# Altium PCB V1.PcbDoc
Units mil, origin at the board's own origin, x right, y up, seen from the top; angles counter-clockwise.
Board outline 1864.61 x 846.94 mil, 2 copper layers (Top Layer, Bottom Layer); 53 components, 58 nets, 253 pads, 63 vias.
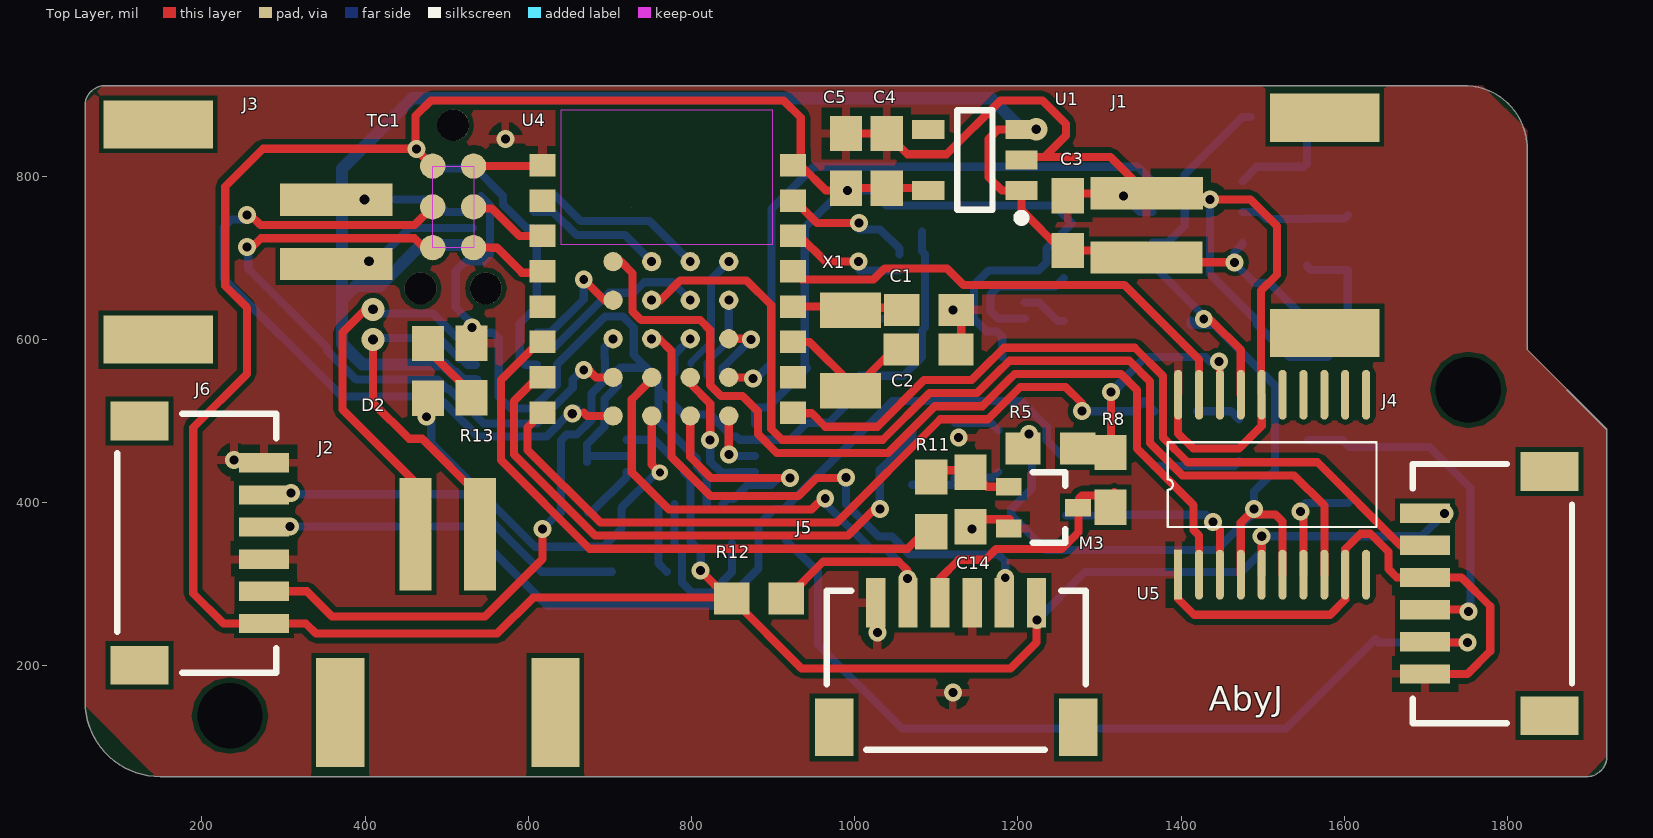
[diagram p0: Top Layer view]
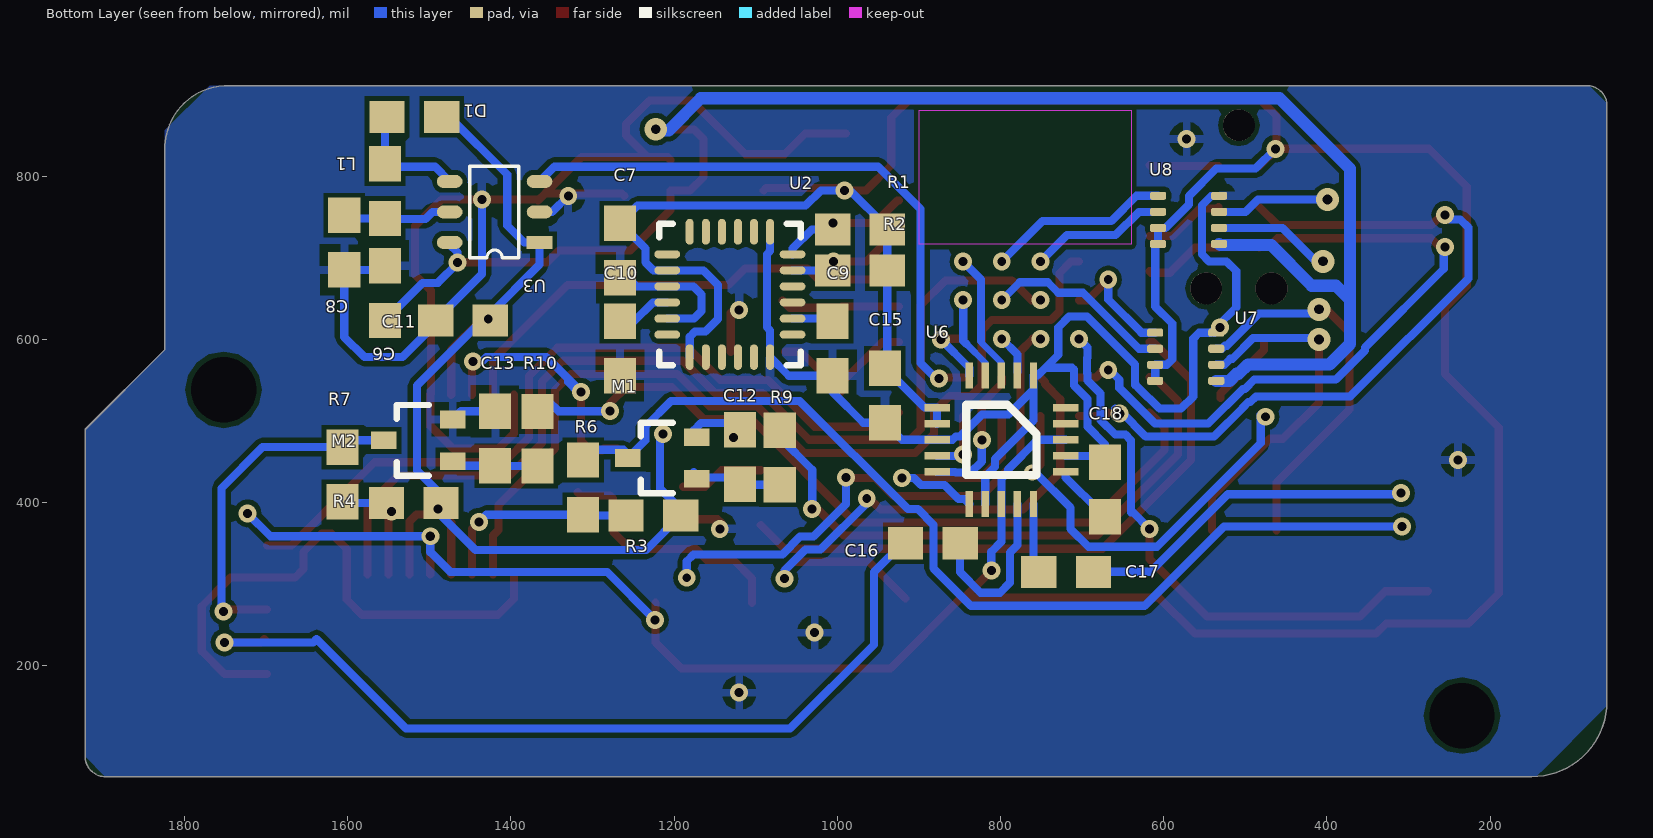
[diagram p1: Bottom Layer view, seen from below]
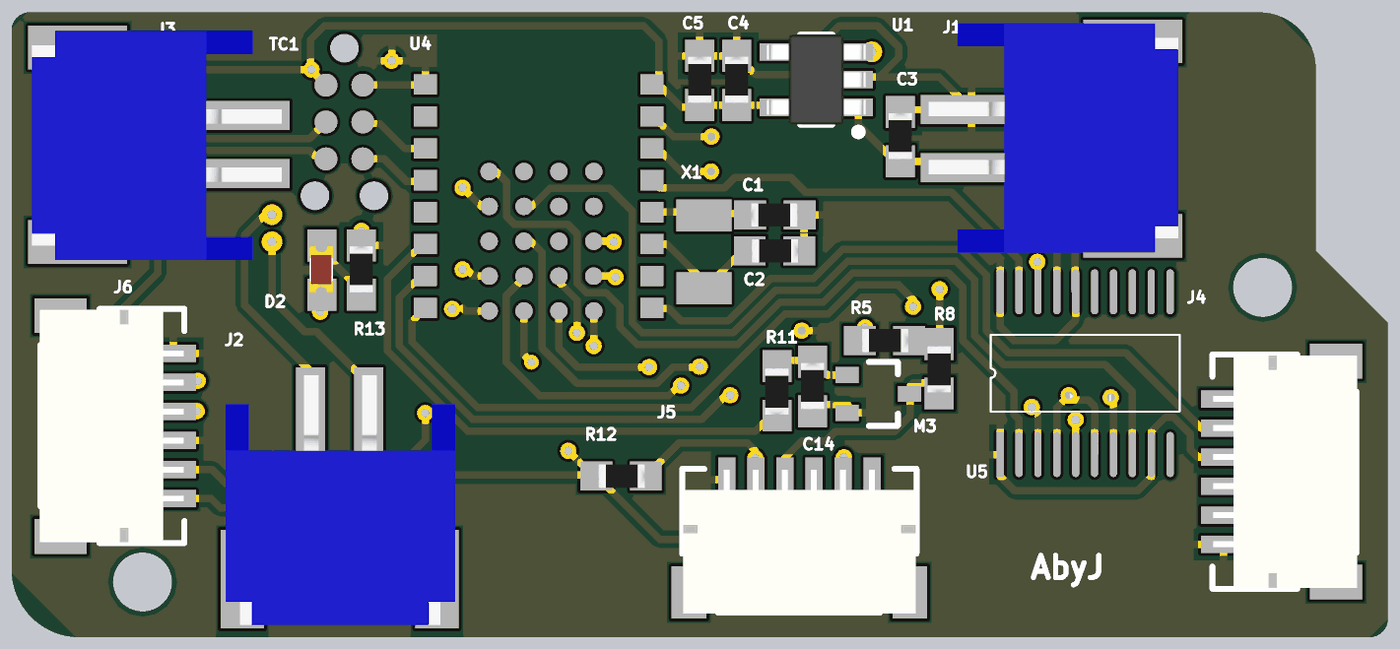
[diagram p2: 3D render of the assembled board from above, using the file's embedded part models]
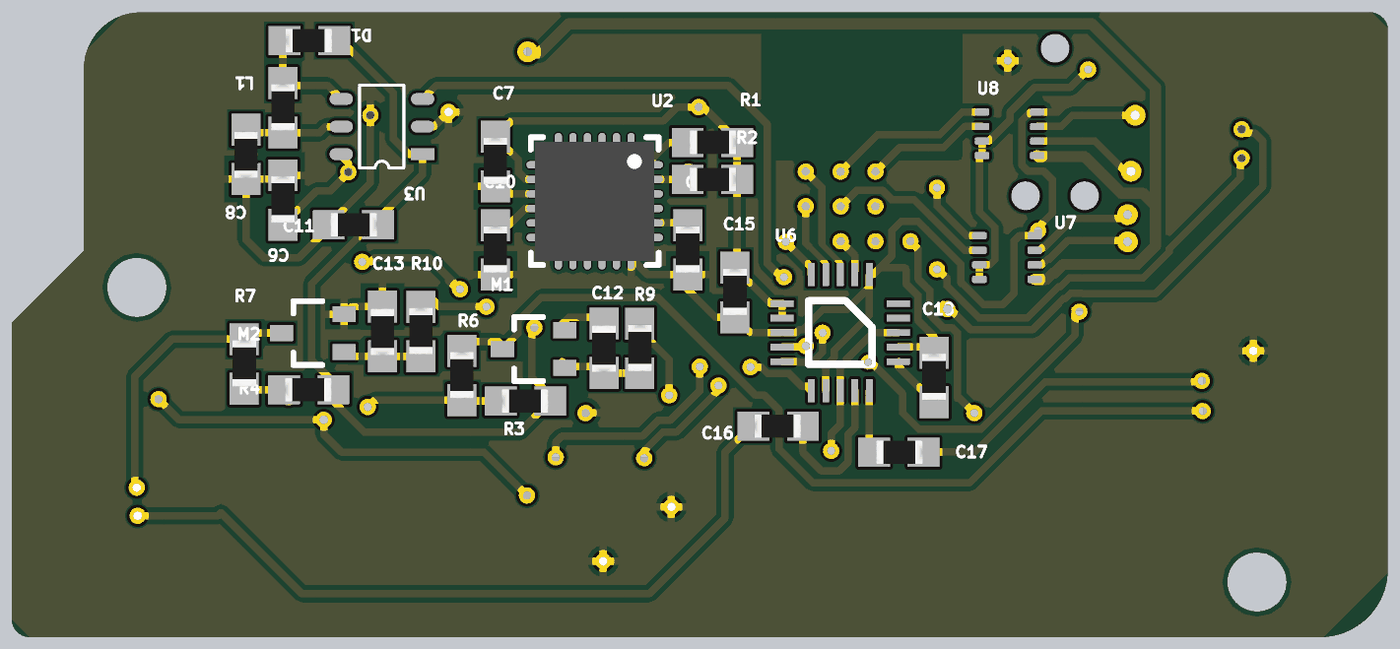
[diagram p3: 3D render of the assembled board from below, using the file's embedded part models]

## Layer stack, top to bottom
Top Solder: solder mask 0.4, Solder Resist, Dk 3.5
Top Layer: signal copper 1.4
Dielectric 1: dielectric 12.6, FR-4, Dk 4.8
Bottom Layer: signal copper 1.4
Bottom Solder: solder mask 0.4, Solder Resist, Dk 3.5

## Board outline
149.18,63.93 cw(c149.04,155.99) 56.98,155.86 56.98,889.09 57.07,889.09 cw(c81.49,886.29) 81.49,910.87 81.49,910.79 1744.37,910.79 1744.37,910.72 cw(c1746.96,833.93) 1823.75,836.53 1823.75,587.53 1921.59,489.69 1921.59,88.74 cw(c1896.78,88.74) 1896.78,63.93

## Design rules (kind name [scope] priority, off if disabled: settings)
Clearance [All] p1: gap=6 ignorepadtopadclearanceinfootprint=FALSE
MinimumSolderMaskSliver [All] p1 off: minsoldermaskwidth=6
PolygonConnect [All] p1: connectstyle=Relief reliefconductorwidth=10 reliefentries=4 polygonreliefangle="90 Angle" airgapwidth=10
RoutingVias [All] p1: holewidth=12 width=22 viastyle="Through Hole" minholewidth=10 minwidth=20 maxholewidth=25 maxwidth=40
SilkToSilkClearance [All] p1: silktosilkclearance=6
SilkToSolderMaskClearance [IsPad] p1 off: minsilkscreentomaskgap=10 clearancetoexposedcopper=TRUE
SolderMaskExpansion [All] p1: expansion=4
Width [All] p1: maxlimit=30 minlimit=6 preferedwidth=10
27 further rules are at their usual default settings.

## Components (designator, comment, footprint, x,y, rotation, side; value= is the part's Value field where it differs from the comment)
C1 "18pF" 0603W 1090.03,635.95 r0 top
C2 "18pF" 0603W 1091.5,587.53 r180 top
C3 "10uF" 0603W 1261.04,743.26 r270 top
C4 "100uF" 0603W 1039.2,819.56 r270 top
C5 "0.1uF" 0603W 989.2,819.56 r270 top
C6 "1uF" 0603W 1554.15,657.46 r270 bottom
C7 "10nF" 0603W 1266.18,709.65 r270 bottom
C8 "4.7uF" 0603W 1604.15,717.46 r90 bottom
C9 "2.2nF" 0603W 1005.63,589.65 r270 bottom
C10 "0.1uF" 0603W 1266.18,589.65 r270 bottom
C11 "1uF" 0603W 1457.7,623.01 r0 bottom
C12 "4.7uF" 0603W 1119.06,454.63 r90 bottom
C13 "4.7uF" 0603W 1419.25,477.38 r90 bottom
C14 "4.7uF" 0603W 1141.86,404.58 r270 top
C15 "0.1uF" 0603W 941.57,532.06 r270 bottom
C16 "10uF" 0603W 883.94,350 r180 bottom
C17 "10uF" 0603W 718.57,314.56 r0 bottom
C18 "1uF" 0603W 671.92,416.92 r270 bottom
D1 "D Schottky" 0603W 1519.15,872.46 r180 bottom
D2 "LED" "0603 LED" 477.57,562.04 r270 top
J1 "JST PH 2" "JST PH 2" 1369.14,713.68 r90 top
J2 "JST PH 2" "JST PH 2" 475.48,349.41 r0 top
J3 "JST PH 2" "JST PH 2" 353.24,757.21 r270 top
J4 "6 Pin" "JST SM06B-SRSS-TB" 1778.84,288.34 r270 top
J5 "6 Pin" "JST SM06B-SRSS-TB" 1124.28,197 r180 top
J6 "6 Pin" "JST SM06B-SRSS-TB" 196.1,350.17 r90 top
L1 "22uH" 0603W 1554.15,782.46 r270 bottom
M1 "MOSFET N CHANNEL" SOT323 1214.31,454.49 r0 bottom
M2 "MOSFET N CHANNEL" SOT323 1513.34,476.13 r0 bottom
M3 "MOSFET N CHANNEL" SOT323 1231.12,393.66 r0 top
R1 "10K" 0603W 971.18,734.65 r0 bottom
R2 "10K" 0603W 971.18,684.39 r0 bottom
R3 "10K" 0603W 1226.3,383.98 r180 bottom
R4 "10K" 0603W 1519.92,399.15 r180 bottom
R5 "10K" 0603W 1240.62,465.9 r180 top
R6 "50" 0603W 1311.46,419.47 r270 bottom
R7 "50" 0603W 1606.36,435.26 r270 bottom
R8 "50" 0603W 1313.4,426.78 r90 top
R9 "10K" 0603W 1070.39,456.15 r270 bottom
R10 "10K" 0603W 1367.28,479.02 r270 bottom
R11 "10K" 0603W 1093.74,396.72 r90 top
R12 "300K" 0603W 883.75,282.2 r180 top
R13 "300K" 0603W 530.59,562.62 r270 top
TC1 "" TC2030-IDC-NL 507.9,762.19 r270 top
U1 "MIC5205_VOLTAGE_REG" SOT-23-5 1204.2,782.16 r180 top
U2 "MPU-6050" QFN24 1131.18,654.65 r270 bottom
U3 "MAX8570" SOT23-6 1364.73,718.57 r0 bottom
U4 "B3 DCC ,C3 DEC4 for power saving , 10uH , 15nH" BC832 617.32,485.62 r0 top
U5 "INA418" TSSOP-20 1396.27,311.54 r90 top
U6 "PCM1774RGPT" QFN20 759.52,555.54 r270 bottom
U7 "DRV8838" DRV8838 575.96,575.53 r0 bottom
U8 "DRV8838" DRV8838 572.43,743.3 r0 bottom
X1 "32.768 Crystal" "32.768 Crystal" 994.21,632.57 r270 top

## Footprints (in the part's own frame and the unit in brackets; to place one, negate y for a bottom-side part, rotate by r counter-clockwise, add the part's x,y. Pads: shape width x height; smd on the part's side, far side on the other; paste and mask are expansions set on the pad)
"32.768 Crystal" [mm] "for BLE radio"
  rect 1.1x1.9 smd: 1(-0.07,0.019) 2(2.432,0.02)
  body extent -0.39,-0.71 2.81,0.78, height 0.9
"0603 LED" [mm]
  rect 1.1x1 smd: 1(0.868,-0.008) 2(-0.832,-0.008)
  body extent -0.8,-0.42 0.8,0.38, height 0.6
0603W [mm]
  rect 1.1x1 smd: 1(-0.825,0) 2(0.875,0)
  body extent -0.8,-0.4 0.8,0.4, height 0.45
BC832 [mil]
  rect 31.5x27.56 smd: P$1(0,327.56) P$2(0,284.25) P$3(0,240.94) P$4(0,197.64) P$5(0,154.33) P$6(0,111.02) P$7(0,67.72) P$8(0,24.41) P$9(307.09,24.41) P$10(307.09,67.72) P$11(307.09,111.02) P$12(307.09,154.33) P$13(307.09,197.64) P$14(307.09,240.94) P$15(307.09,284.25) P$16(307.09,327.56)
  rrect100% 23.62x23.62 smd: P$A1(86.61,209.41) P$A2(86.61,162.17) P$A3(86.61,114.92) P$A4(86.61,67.68) P$A5(86.61,20.43) P$B1(133.86,209.41) P$B2(133.86,162.17) P$B3(133.86,114.92) P$B4(133.86,67.68) P$B5(133.86,20.43) P$C1(181.1,209.41) P$C2(181.1,162.17) P$C3(181.1,114.92) P$C4(181.1,67.68) P$C5(181.1,20.43) P$D1(228.35,209.41) P$D2(228.35,162.17) P$D3(228.35,114.92) P$D4(228.35,67.68) P$D5(228.35,20.43)
DRV8838 [mm]
  rrect50% 0.5x0.25 smd: 1(-1.025,0.675) 2(-1.025,0.175) 3(-1.025,-0.325) 4(-1.025,-0.825) 5(0.875,-0.825) 6(0.875,-0.325) 7(0.875,0.175) 8(0.875,0.675)
"JST PH 2" [mm] "2mm pitch"
  rect 1x3.5 smd: 1(-0.346,0.295) 2(1.657,0.294)
  rect 1.5x3.4 smd: 3(-2.691,-5.251) 4(4.005,-5.252)
  body extent -3.27,-6.83 4.63,1.77, height 5.5
"JST SM06B-SRSS-TB" [mm] "1.0mm pitch/Disconnectable Crimp style connector"
  rect 0.6x1.55 smd: 1(-2.5,-2.032) 2(-1.5,-2.032) 3(-0.5,-2.032) 4(0.5,-2.032) 5(1.5,-2.032) 6(2.5,-2.032)
  rect 1.2x1.8 smd: M(-3.8,1.843) M(3.8,1.843)
  silkscreen extent -4.03,-2.41 4.03,2.54, body extent -4,-2.38 4,2.57, height 2.95
QFN20 [mm]
  rect 0.8x0.23 smd: 1(0,0) 2(0,-0.5) 3(0,-1) 4(0,-1.5) 5(0,-2) 11(4,-2) 12(4,-1.5) 13(4,-1) 14(4,-0.5) 15(4,0)
  rect 0.23x0.8 smd: 6(1,-3) 7(1.5,-3) "8 EP"(2,-3) 9(2.5,-3) 10(3,-3) 16(3,1) 17(2.5,1) 18(2,1) 19(1.5,1) 20(1,1)
  silkscreen extent 0.91,-2.09 3.09,0.09
QFN24 [mm] "pitch 0.5mm"
  oval 0.8x0.25 smd mask+0.05: 1(-1.955,1.24) 2(-1.955,0.74) 3(-1.955,0.24) 4(-1.955,-0.26) 5(-1.955,-0.76) 6(-1.955,-1.26) 13(1.945,-1.26) 14(1.945,-0.76) 15(1.945,-0.26) 16(1.945,0.24) 17(1.945,0.74) 18(1.945,1.24)
  oval 0.25x0.8 smd mask+0.05: 7(-1.255,-1.96) 8(-0.755,-1.96) 9(-0.255,-1.96) 10(0.245,-1.96) 11(0.745,-1.96) 12(1.245,-1.96) 19(1.245,1.94) 20(0.745,1.94) 21(0.245,1.94) 22(-0.255,1.94) 23(-0.755,1.94) 24(-1.255,1.94)
  silkscreen extent -2.21,-2.21 2.19,2.19, body extent -2.06,-2.06 2.05,2.04, height 0.95
SOT23-6 [mm]
  rect 0.8x0.4 smd: 1(0,0)
  oval 0.8x0.4 smd: 2(0,-0.95) 3(0,-1.9) 4(2.8,-1.9) 5(2.8,-0.95) 6(2.8,0)
  silkscreen extent 0.65,-2.38 2.17,0.48
SOT323 [mm] "Smaller package for SOT23"
  rect 0.8x0.55 smd: 1(-1.075,0.65) 2(-1.075,-0.65) 3(1.075,0)
  silkscreen extent -0.32,-1.1 0.67,1.1, body extent -0.67,-1.1 0.67,1.1, height 1.1
SOT-23-5 [mm] "3D view"
  rect 1x0.6 smd: 1(0,0) 2(0,-0.95) 3(0,-1.9) 4(2.9,-1.9) 5(2.9,0)
  silkscreen extent -0.13,-2.5 2,0.97, body extent -0.25,-2.5 3.15,0.6, height 1.45
TC2030-IDC-NL [mil]
  round 39 hole 39 unplated: 1(-100,0) 1(100,40) 2(100,-40)
  rrect100% 31x31 smd: 1(-50,-25) 2(-50,25) 3(0,-25) 4(0,25) 5(50,-25) 6(50,25)
  Top Layer keep-out region: -50,-25 -50,25 50,25 50,-25
TSSOP-20 [mm]
  rect 1.55x0.25 smd: 1(0,0)
  oval 1.55x0.25 smd: 2(0,-0.65) 3(0,-1.3) 4(0,-1.95) 5(0,-2.6) 6(0,-3.25) 7(0,-3.9) 8(0,-4.55) 9(0,-5.2) 10(0,-5.85) 11(5.6,-5.85) 12(5.6,-5.2) 13(5.6,-4.55) 14(5.6,-3.9) 15(5.6,-3.25) 16(5.6,-2.6) 17(5.6,-1.95) 18(5.6,-1.3) 19(5.6,-0.65) 20(5.6,0)
  silkscreen extent 1.48,-6.18 4.12,0.33

## Part data
C1 C2 C3 C4 C5 C6 C7 C8 C9 C10 C11 C12 C13 C14 C15 C16 C17 C18: library part Capacitor, "SMD Cap 0603"
D1: "Schottky Diode", Code_JEDEC=DO-214-AA, LatestRevisionDate=17-Jul-2002, LatestRevisionNote="Re-released for DXP Platform.", PackageDescription="DO-214-AA/SMB; 2 C-Bend Leads; Body 5.3 x 3.6 mm, inc. leads (LxW)", PackageReference=SMB, Published=8-Jun-2000, Publisher="Altium Limited"
D2: "LED SMD 1206/0603"
J1 J2 J3: Supplier Part Number 1=455-1749-6-ND, Supplier 1=Digikey
L1: library part Inductor
M1 M2 M3: digikey part number=568-5987-1-ND
R1 R2 R3 R4 R5 R6 R7 R8 R9 R10 R11 R12 R13: library part Resistor
TC1: library part TC2030-IDC-NL, DeviceName=-NL, DeviceSetName=TC2030-IDC, GateName_1=A, LibraryName=TagConnect, Package=TC2030-IDC-NL, SymbolName_1=TC2030-IDC
U1: "3.3V LDO SMD", Sparkfun #=PRT-1125
U2: Package=QFN.24.4X4, DeviceSetName=MPU-6050, GateName_1=G$1, LibraryName=invensense, SymbolName_1=MPU-6050
U4: library part BC832-V1, Package=BC832, DeviceSetName=BC832-V1, GateName_1=G$1, LibraryName=BC832, SymbolName_1=BC832-V1
U6: Package=QFN-20-4X4, DeviceName=RGPT, DeviceSetName=PCM1774, GateName_1=G$1, LibraryName=TI, SymbolName_1=PCM1774
X1: digikey number=XC1617CT-ND

## Free pads (board coordinates)
  round 39 hole 80 unplated: 1(234.36,138.74) 2(1751.89,537.97)

## Via types
v1: diameter 22, hole 11, Top Layer to Bottom Layer, 55 vias
v2: diameter 28, hole 12, Top Layer to Bottom Layer, 5 vias
v3: diameter 22, hole 12, Top Layer to Bottom Layer, 2 vias
v4: diameter 20, hole 10, Top Layer to Bottom Layer, 1 vias

## Nets (pads, with @x,y where several pads share a name; then routed paths per layer and width w, separated by ;. In a path a pad name is that pad's centre, name@x,y a point inside that pad or via, vN(x,y) a via of type N, cw(c..) or ccw(c..) an arc to the next point about the centre after c; other vN are vias at no path point)
ADR: U4.P$C3 U6.2 | length 49
  Bottom Layer w10: U6.2@779.2,559.54 779.2,581.32 v1(798.42,600.54)
AIN1: J4.2 U4.P$9 | length 966.2
  Top Layer w10: U4.P$9 934.96,510.03 935.62,509.37 947.27,509.37 963.86,492.78 1027.71,492.78 1084.87,549.94 1143.28,549.94 1156.63,563.29 1156.63,563.4 1182.81,589.58 1343.08,589.58 1377.77,554.9 1377.77,479.46 1408.03,449.2 1566.85,449.2 1668.65,347.4 J4.2
AIN2: U4.P$13 U5.19 | length 596.9
  Top Layer w10: U4.P$13 934.64,673.03 1022.88,673.03 1036.7,686.85 1113.2,686.85 1133.41,666.63 1330.51,666.63 1421.86,575.28 U5.19
AIN3: U4.P$B2 U5.8 | length 1246.5
  Top Layer w10: v1(751.18,647.79) 761.79,647.79 786.09,672.09 867.4,672.09 897.65,641.84 897.65,490.19 911.06,476.78 1034.34,476.78 1091.5,533.94 1149.9,533.94 1172.63,556.67 1172.63,556.77 1189.44,573.58 1336.46,573.58 1361.77,548.27 1361.77,472.84 1401.4,433.2 1538.33,433.2 1575.41,396.13 U5.8
AIN4: U4.P$A1 U5.2 | length 1128.3
  Top Layer w10: U4.P$A1 713.5,695.03 727.73,680.81 727.73,633.94 738.32,623.35 810.66,623.35 822.86,611.15 822.86,543.85 836.23,530.49 862.6,530.49 881.46,511.63 881.46,483.75 904.43,460.78 1040.96,460.78 1098.12,517.94 1156.53,517.94 1188.63,550.04 1188.63,550.14 1196.07,557.58 1326.16,557.58 1345.77,537.97 1345.77,465.9 1415.03,396.63 1415.03,366.13 1421.86,359.3 U5.2
AIN5: J6.2 U4.P$A3 | length 698
  Top Layer w10: J6.2 328.89,291.11 359.57,260.44 546.98,260.44 617.32,330.78 v1(617.32,367.69)
  Bottom Layer w10: v1(617.32,367.69) 637.3,387.66 639.96,387.66 639.96,476.14 646.96,483.14 659.39,483.14 677.4,501.15 677.4,533.48 693.4,549.48 693.4,558.29 693.92,558.8 693.92,577.03 693.4,577.55 693.4,590.01 v1(703.93,600.54)
AIN6: J5.5 R12.1 U4.P$B4 | length 711.8
  Top Layer w10: U4.P$B4 745.44,547.56 745.44,545.1 726.84,526.5 726.84,436.85 772.39,391.3 947.18,391.3 v1@963.86,407.99 ; R12.1 961.34,327.3 1053.94,327.3 1064.47,316.77 v1(1064.47,306.52)
  Bottom Layer w10: v1(963.86,404.97) 963.86,398.6 1020.33,342.14 1038.89,342.14 v1@1064.47,316.56
AIN7: J5.2 U4.P$B3 | length 678.4
  Top Layer w10: v1(751.18,600.54) 760.49,600.54 775.61,585.42 775.61,496.6 775.61,455.85 823.47,407.99 931.15,407.99 953.15,429.99 v1@987.71,429.99
  Bottom Layer w10: v1(989.2,430.56) 989.2,397.84 1028.9,358.14 1045.52,358.14 1067.28,336.39 1176,336.39 1184.42,327.97 v1(1184.42,307.73)
EN1: U4.P$A2 U7.5 | length 141
  Top Layer w10: v1(667.93,673.03) 693.17,647.79 U4.P$A2
  Bottom Layer w10: U7.5 627.41,608.01 667.93,648.52 v1@667.93,668.8
EN2: U4.P$C1 U8.5 | length 225
  Bottom Layer w10: U8.5 633.45,775.78 664.16,745.06 748.39,745.06 v1(798.42,695.03)
GND: "U6.8 EP" C1.2 C2.1 C3.1 C4.1 C5.1 C6.1 C7.2 C8.1 C9.2 C10.2 C11.2 C12.2 C13.2 C14.2 C15.2 C18.1 J1.2 J4.3 J4.6 J5.3 J5.6 J6.3 J6.6 M1.2 M2.2 M3.2 R13.1 TC1.2@532.9,812.19 U1.2 U2.1 U2.9 U2.11 U2.18 U3.2 U4.P$1 U5.1 U5.9 U5.16 U5.20 U6.1 U6.12 U6.17 U7.4 U8.4 | length 4474.3
  Top Layer w10: TC1.2@532.9,812.19 616.33,812.19 U4.P$1 ; C5.1 C4.1 1064.56,826.69 1112.6,826.69 1178.6,892.69 1229.9,892.69 1258.7,863.9 1258.7,849.5 1232.28,823.09 ; C1.2@1130.24,632.57 1130.57,632.24 C2.1@1130.57,584.62 ; C14.2@1141.92,372.56 1141.92,374.67 1146.63,379.38 1189.96,379.38 ; U1.2 1207.73,823.09 1232.28,823.09 ; C3.1 1264.02,778.72 J1.2@1357.77,778.72 ; U5.1 1396.27,282.03 1416,262.3 1582.32,262.3 1601,280.98 U5.9 1601,342.76 1619.9,361.66 1631.77,361.66 1653.89,339.54 1653.89,318.32 1664.18,308.03 J4.3 1743.47,308.03 1778.67,272.83 1778.67,217.73 1750.85,189.92 J4.6 ; U5.20 1396.27,484.58 1414.86,465.99 1471.02,465.99 1498.63,493.61 U5.16 1497.93,532.72 1497.93,659.63 1517.34,679.05 1517.34,738.88 1484.89,771.34 v1(1435.49,771.34) 1367.9,771.34 1366.53,769.96 J1.2@1357.77,778.72 ; 1232.28,823.09 1313.4,823.09 J1.2 J1.2@1357.77,778.72
  Bottom Layer w10: U7.4@537.75,607.97 v1(531.06,614.65) v1@535.59,614.65 ; U8.4@541.84,775.21 552.92,764.13 552.92,724.55 552.92,704.08 544.29,695.45 523.09,695.45 511.12,683.48 511.12,639.12 v1@535.59,614.65 ; 631.25,540.92 605.33,515 578.62,515 563.73,529.89 563.73,600.91 556.66,607.97 542.28,607.97 v1@535.59,614.65 ; 633.45,543.12 634.52,543.12 635.36,543.97 635.36,569.14 693.89,627.67 716.04,627.67 729.18,614.52 729.18,580.89 744.97,565.09 ; C18.1 671.92,471.33 693.4,492.82 693.4,526.85 709.92,543.37 709.92,562.7 712.31,565.09 744.97,565.09 ; C18.1@675.7,457.12 U6.17 ; U6.12 818.57,432 806.86,443.71 806.86,453.12 759.52,500.47 759.52,538.54 ; U2.1 1082.35,707.91 1086.18,704.08 1086.18,614.65 1082.35,610.82 U2.18 1059.46,555.2 C9.2 1005.63,535.13 968.12,497.61 C15.2 920.76,476.8 877.63,476.8 858.62,476.8 854.79,480.64 849.72,480.64 844.86,485.5 844.86,485.64 822.54,507.97 790.09,507.97 759.52,538.54 ; C12.2@1122.89,497.51 1166.83,497.51 M1.2@1175.82,488.51 ; U2.11 1175.5,625.34 1166.18,634.65 1166.18,654.65 1176.24,664.71 U2.9 1245.69,664.71 C7.2@1256.18,675.2 ; v1(1329.6,775.78) 1349.41,755.97 U3.2 ; C13.2 1460.91,511.83 M2.2 ; v1(1435.49,771.34) 1435.49,679.67 C11.2 1492.15,618.5 1532.55,578.09 1579.48,578.09 1604.15,602.76 C8.1 1559.11,684.98 C6.1 ; 744.97,565.09 754.53,555.54 U6.1 759.52,538.54
  other v1: 1120.12,166.93 1027.71,240.49 1143.96,367.69 239.36,452.01 1127.41,479.46 1120.12,635.95 571.92,845.26
IN1: R9.1 U4.P$7 | length 735
  Top Layer w10: U4.P$7 611.29,553.34 582.36,524.42 582.36,458.64 681.7,359.3 991.96,359.3 1029.29,396.63 1030.67,395.24 v1(1030.67,391.78)
  Bottom Layer w10: v1(1030.67,391.78) 1030.67,440.07 1070.39,479.79 R9.1
IN2: R10.1 U4.P$8 | length 955.6
  Top Layer w10: U4.P$8 599.21,491.92 599.21,464.42 688.33,375.3 978.11,375.3 1104.75,501.94 1163.16,501.94 1202.8,541.58 1258.29,541.58 1278.31,521.56 v1(1278.31,511.81)
  Bottom Layer w10: v1(1278.31,511.81) 1341.75,511.81 1354.36,524.42 R10.1
IN3: R11.1 U4.P$6 | length 752.7
  Top Layer w10: U4.P$6 613.07,596.64 566.36,549.94 566.36,452.01 675.07,343.3 1064.56,343.3 R11.1@1093.74,372.49
LED: D2.1 U4.P$B5 | length 494.4
  Top Layer w10: U4.P$B5 751.18,446.68 v4(761.23,436.64)
  Bottom Layer w10: v1@481.05,507.97 481.05,472.85 608.21,345.69 692.33,345.69 714.33,367.69 714.33,393.58 757.39,436.64 v4(761.23,436.64)
  other v1: 475,505
LOUT: C17.1 J6.5 | length 431.2
  Bottom Layer w10: v1@310.85,410.13 521.14,410.13 616.2,315.07 C17.1@702.72,315.07
  other v1: 309.1,411.31
LRCK: U4.P$C5 U6.11 | length 278.6
  Top Layer w10: U4.P$C5 798.42,455.67 824.1,429.99 v1(920.5,429.99)
  Bottom Layer w10: U6.11 844.43,404.23 851.26,404.23 868.46,421.43 897.46,421.43 906.02,429.99 v1(920.5,429.99)
MC: U4.P$D2 U6.4 | length 103.7
  Bottom Layer w8: U6.4 818.57,571.05 841.57,594.05
  Bottom Layer w10: 841.57,594.05 845.67,598.15 v1(845.67,648.03)
MD: U4.P$D1 U6.3 | length 144.5
  Bottom Layer w8: U6.3@798.89,569.9 798.89,571.31 823.67,596.09 823.67,597.72
  Bottom Layer w10: 823.67,597.72 823.67,673.03 v1(845.67,695.03)
NetC8_2: C8.2 L1.2 U3.5 | length 134.6
  Bottom Layer w10: U3.5 1495.88,755.97 1504.39,747.46 1553.6,747.46 L1.2 1600.26,748.01 C8.2
NetC9_1: C9.1 U2.20 | length 50.5
  Bottom Layer w10: C9.1 1008.84,625.34 U2.20
NetC10_1: C10.1 U2.10 | length 57.3
  Bottom Layer w10: U2.10 1225.81,645.02 1248.7,622.13 C10.1@1256.18,622.13
NetC12_1: C12.1 M1.1 R9.2 | length 104.6
  Bottom Layer w10: R9.2 C12.1@1118.61,421.7 ; C12.1@1122.44,430.13 1122.89,430.58 1169.07,430.58 M1.1@1175.82,437.33
NetC13_1: C13.1 M2.1 R10.2 | length 106.2
  Bottom Layer w10: R10.2 1418.92,444.58 C13.1 1465.38,444.9 M2.1
NetC14_1: C14.1 M3.1 R11.2 | length 103.4
  Top Layer w10: R11.2@1093.74,439.42 1141.86,439.42 1162.02,419.25 M3.1
NetC16_2: C16.2 U6.14 | length 212.4
  Bottom Layer w10: U6.14 779.2,347.81 788.21,338.81 788.21,301.68 800.54,289.35 824.28,289.35 849.49,314.56 C16.2
NetC17_2: C17.2 U6.15 | length 87.2
  Bottom Layer w10: U6.15 759.52,325.19 C17.2@769.64,315.07
NetC18_2: C18.2 U6.16 | length 71.5
  Bottom Layer w10: C18.2@673.17,387.66 677.04,387.66 720.15,430.77 U6.16
NetD1_1: D1.1 L1.1 U3.4 | length 146.7
  Bottom Layer w10: U3.4 1493.03,811.43 1550.65,811.43 L1.1 1554.15,869.94 D1.1
NetD2_2: D2.2 R13.2 | length 88.7
  Top Layer w10: D2.2 477.27,586.91 530.59,533.6 R13.2
OUT1: J6.4 M1.3 R6.1 | length 1215.1
  Bottom Layer w10: v1@312.79,370.68 526.21,370.68 623.54,273.35 836.18,273.35 882.14,319.31 882.14,372.62 901.3,391.78 913.4,391.78 1046.05,524.42 1203.64,524.42 1235.31,492.75 1235.31,475.81 M1.3 ; M1.3@1260.47,462.92 1262.07,464.52 1298.88,464.52 R6.1
  other v1: 307.86,370.44
OUT2: J4.4 M2.3 R7.1 | length 430.4
  Top Layer w10: J4.4 1749.95,268.66 v1(1752.05,266.56)
  Bottom Layer w10: M2.3 1597.97,476.13 R7.1 1704.33,467.74 1754.71,417.36 v1@1754.71,264.43
OUT3: J5.4 M3.3 R8.1 | length 302.6
  Top Layer w10: J5.4 1104.59,306.97 1127.41,329.79 1160.31,329.79 1173.28,342.76 1253.36,342.76 1274.03,363.43 M3.3@1274.03,396.72 ; 1274.6,404.97 1278.31,408.68 1314.13,408.68 R8.1@1317.96,412.51
PH1: U4.P$C2 U7.6 | length 230.9
  Bottom Layer w10: U7.6 630.35,588.32 698.94,656.91 729.18,656.91 742.07,669.79 776.42,669.79 v1(798.42,647.79)
PH2: U4.P$B1 U8.6 | length 169.6
  Bottom Layer w10: U8.6 630.51,756.09 658.95,727.65 718.57,727.65 v1(751.18,695.03)
ROUT: C16.1 J4.5 | length 1084.8
  Top Layer w10: J4.5 1702.14,232.58 1706.24,228.49 v1(1750.85,228.49)
  Bottom Layer w10: C16.1@915.97,353.63 955.04,314.56 955.04,225.67 1057.83,122.87 1528.29,122.87 1638,232.58 1642.1,228.49 v1(1750.85,228.49)
RX: TC1.3 U4.P$A5 | length 906.1
  Top Layer w10: v1(255.15,752.27) 259.18,752.27 271.68,739.77 460.48,739.77 TC1.3 ; 667.93,510.04 671.92,506.05 U4.P$A5
  Bottom Layer w10: v1@249.34,746.81 236.58,746.81 226.58,736.8 226.58,674.61 371.49,529.7 471.06,529.7 471.33,529.97 487.06,529.97 493.94,523.09 496.43,523.09 502.44,517.08 502.44,516.65 538.35,480.74 622.05,480.74 623.96,482.65 623.96,482.77 649.94,508.75 v3(653.88,508.75) ; v3(653.88,508.75) 653.88,509.55 659.34,515 659.74,514.6 v3(653.88,508.75)
SCK: U4.P$C4 U6.10 | length 173.9
  Top Layer w10: U4.P$C4 798.42,545.67 822.86,521.23 v1(822.86,476.53)
  Bottom Layer w10: v1(822.86,476.53) 822.86,450.34 836.56,436.64 854.79,436.64 855.58,437.43 U6.10
SCKI: U4.P$D5 U6.9 | length 80
  Top Layer w10: v1(845.67,458.64) U4.P$D5
  Bottom Layer w10: v1(845.67,458.64) 847.2,457.12 U6.9
SCL: R2.2 U2.23 U4.P$14 | length 142.4
  Top Layer w10: U4.P$14 932.53,726.56 964.06,695.03 v1(1004.62,695.03)
  Bottom Layer w10: R2.2 U2.23
SDA: R1.2 U2.24 U4.P$15 | length 158
  Top Layer w10: U4.P$15 926.19,769.87 953.72,742.34 v1(1005.14,742.34)
  Bottom Layer w10: R1.2 1031.18,734.65 1054.79,711.04 U2.24
SDIN: U4.P$D3 U6.5 | length 85.8
  Top Layer w10: U4.P$D3 871.88,600.54 v1(872.64,599.79)
  Bottom Layer w10: U6.5 838.26,565.09 872.64,599.47 v1(872.64,599.79)
SENSE1: R3.1 R6.2 U5.3 | length 252.4
  Top Layer w10: v1(1439.09,376.05) 1447.45,367.69 U5.3
  Bottom Layer w10: R3.1 1310.42,383.98 R6.2 1430.12,385.02 v1(1439.09,376.05)
SENSE2: R4.1 R7.2 U5.7 | length 133.7
  Top Layer w10: v1(1546.07,389.04) 1549.82,385.29 U5.7
  Bottom Layer w10: R4.1 1604.7,399.15 R7.2
SENSE3: R5.1 R8.2 U5.18 | length 324.9
  Top Layer w10: R5.1@1269.9,466.25 1285.88,466.25 1288.14,463.99 1302.51,463.99 1314.13,475.61 1314.13,507.6 v1(1314.13,535.58) ; v1(1446.5,572.63) 1447.45,571.68 U5.18
  Bottom Layer w10: 1328.81,548.33 1329.6,547.54 1317.64,535.58 v1(1314.13,535.58) 1314.13,535.82 1356.41,578.09 1430.02,578.09 1435.49,572.63 v1(1446.5,572.63)
SHDN: U3.3 U4.P$D4 | length 739.6
  Top Layer w10: U4.P$D4 873.76,553.3 v1(875.16,551.9)
  Bottom Layer w10: v1@880.16,553.06 897.98,570.88 897.98,759.47 949.94,811.43 1346.67,811.43 U3.3
SWCLK: TC1.6 U4.P$4 | length 97.8
  Top Layer w10: TC1.6 555.29,712.19 555.34,712.14 561.46,712.14 592.06,681.54 615.6,681.54 U4.P$4
SWDIO: TC1.4 U4.P$3 | length 99.2
  Top Layer w10: TC1.4 535.06,760.03 555.7,760.03 589.16,726.56 U4.P$3
T+1: J2.2 U7.2 | length 444.9
  Top Layer w10: v2(409.71,599.79) 409.71,522.1 453.68,478.13 469.66,478.13 540.77,407.03 J2.2@540.77,365.87
  Bottom Layer w10: v2@404.95,594.05 412.38,601.48 490.49,601.48 515.89,576.09 518.39,576.09 525.84,568.64 U7.2
T+2: J3.2 U8.2 | length 151.7
  Bottom Layer w10: v2@399.35,690.59 408.47,690.59 454.29,736.41 U8.2
  other v2: 404.95,695.45
T-1: J2.1 U7.3 | length 477.1
  Top Layer w10: v2(409.71,636.64) 400.63,636.64 372.42,608.42 372.42,513.95 461.91,424.46 J2.1@461.91,365.92
  Bottom Layer w10: v2@404.95,631.57 483.04,631.57 522.52,592.09 525.01,592.09 528.78,588.32 U7.3
T-2: J3.1 U8.3 | length 141
  Bottom Layer w10: v2@397.44,771.34 484.5,771.34 499.74,756.09 U8.3
  other v2: 399.35,771.34
TX: TC1.5 U4.P$A4 | length 826.5
  Top Layer w10: v1(255.15,713.2) 257.56,713.2 259.72,711.03 272.46,723.77 460.48,723.77 467.9,716.35 478.74,716.35 TC1.5 ; v1@669.22,567.16 683.08,553.3 U4.P$A4
  Bottom Layer w10: v1@256.85,708.91 256.85,686.38 353.35,589.88 353.35,586.35 389.09,550.62 489.04,550.62 500.56,539.09 503.06,539.09 545.41,496.74 610.77,496.74 654.38,540.36 654.38,550.38 666.4,562.4 v1(667.93,562.4)
V_H: C11.1 D1.2 R3.2 R4.2 R5.2 U3.1 U5.4 U5.6 U5.17 | length 1394.9
  Top Layer w10: v1@1426.83,622.56 1437.14,622.56 1473.04,586.65 U5.17 ; U5.4 1473.04,375.37 1482.97,385.29 1515.64,385.29 1524.23,376.71 U5.6
  Bottom Layer w10: v1(1213.31,483.63) 1217.17,479.77 1217.17,417.19 1191.85,391.87 R3.2 1234.02,341.81 1443.42,341.81 1489.24,387.64 v1(1489.24,391.78) 1489.24,413.34 1515.02,439.11 1515.02,543.19 1440.75,617.46 1411.67,617.46 C11.1@1411.67,623.01 ; v1(1427.64,625) 1427.64,628.45 1364.73,691.36 U3.1 1383.55,718.57 1404.41,739.42 1404.41,801.74 1475.13,872.46 D1.2
VBAT: C3.2 C6.2 J1.1 U1.1 U1.3 U3.6 U7.1 U8.1 | length 2092
  Top Layer w10: U1.3 1175.68,856.97 1163.95,845.24 1163.95,798.52 1180.31,782.16 U1.1 1204.2,758.21 1253.6,708.81 C3.2 1340.86,708.81 1355.43,694.24 v1(1465.38,694.24)
  Bottom Layer w10: U3.6 1474.97,716.16 1465.38,706.57 v1(1465.38,694.24) 1465.38,693.11 1489.24,669.25 1489.24,668.8 1508.36,668.8 C6.2 C6.2@1554.15,628.11
  Bottom Layer w15: U8.1 530.68,715.32 468.3,715.32 418.57,665.59 388.98,665.59 371.85,648.47 ; U7.1 519.36,548.95 510.72,557.59 508.23,557.59 496.7,569.12 396.75,569.12 371.85,594.01 371.85,648.47 ; v2(1222.36,857.34) 1220.93,855.9 1206.51,855.9 1167.22,895.19 458.18,895.19 371.85,808.86 371.85,648.47
VCC: C4.2 C5.2 C7.1 C15.1 J4.1 J5.1 J6.1 R1.1 R2.1 R12.2 TC1.1@482.9,812.19 U1.5 U2.8 U2.13 U4.P$16 U5.5 U6.6 U6.7 U6.13 U6.18 U7.7 U7.8 U8.7 U8.8 | length 4937.5
  Top Layer w10: v1(463.12,833.36) v1@461.91,833.36 ; TC1.1@482.9,812.19 461.91,833.18 v1@461.91,833.36 ; v1(811.24,316.56) R12.2@844.27,283.53 ; C5.2 C4.2 1087.08,785.12 U1.5 ; v1(990.88,782.43) 964.57,782.43 933.81,813.18 933.81,871.78 912.9,892.69 480.77,892.69 461.91,873.83 v1@461.91,833.36 ; J5.1 1222.7,228.49 1190.78,196.56 934.94,196.56 R12.2 845.61,282.2 R12.2@844.27,283.53 ; U5.5 v3(1498.63,358.6) ; v1@461.91,833.36 274.85,833.36 228.61,787.12 228.61,665.16 255.15,638.63 255.15,557.47 189.42,491.75 189.42,288.62 226.3,251.74 J6.1 327.32,251.74 339.82,239.24 561.86,239.24 606.15,283.53 R12.2@844.27,283.53
  Bottom Layer w10: v1(463.12,833.36) 487.48,809 535.62,809 568.92,775.7 568.92,765.17 597.69,736.41 U8.7 U8.8 610.41,713.2 610.41,640.25 589.56,619.4 589.56,575.4 596.33,568.64 U7.7 U7.8 ; U6.18 754.53,476.8 790.86,440.47 790.86,437.08 798.89,429.06 U6.13 798.89,351.91 811.24,339.56 v1@811.24,317.97 ; U6.7 U6.6 893.2,516.17 C15.1 938.7,567.42 R2.1 R1.1 938.7,736.8 v1@986.64,784.74 ; v1(990.88,782.43) 1020.07,782.43 1038.82,763.68 1244.63,763.68 C7.1 1235.08,711.03 1235.08,694.24 1225.24,684.39 U2.8 1163.99,684.39 1146.18,666.58 1146.18,624.65 1161.5,609.34 1174.39,609.34 1180.78,602.95 U2.13 ; v1(1223.29,255.98) 1281.87,314.56 1474.15,314.56 1498.63,339.05 v3(1498.63,358.6) 1694.54,358.6 v1(1722.51,386.57)
XTAL1: C2.2 U4.P$11 X1.2 | length 190.8
  Top Layer w10: U4.P$11 944.78,596.64 995.67,545.75 995.67,535.58 1044.71,584.62 C2.2@1063.64,584.62
XTAL2: C1.1 U4.P$12 X1.1 | length 147.2
  Top Layer w10: U4.P$12 994.21,639.95 995.65,638.52 1058.3,638.52 C1.1@1067.29,647.51
pads on no net: J1.3 J1.4 J2.3 J2.4 J3.3 J3.4 J4.M J5.M J6.M TC1.1@507.9,862.19 TC1.1@547.9,662.19 TC1.2@467.9,662.19 U1.4 U2.2 U2.3 U2.4 U2.5 U2.6 U2.7 U2.12 U2.14 U2.15 U2.16 U2.17 U2.19 U2.21 U2.22 U4.P$2 U4.P$5 U4.P$10 U5.10 U5.11 U5.12 U5.13 U5.14 U5.15 U6.19 U6.20

## Polygon pours and split planes (outlines as drawn)
GND on Bottom Layer "Bottom-GND" (solid, pour order 5): 61.85,145.84 56.98,150.72 56.98,889 78.77,910.79 1769.07,910.79 1823.75,856.12 1823.75,587.53 1921.59,489.69 1921.59,88.74 1896.78,63.93 144.02,63.93 137.75,70.2 137.5,70.2
GND on Top Layer "Top Layer-GND" (solid, remove dead copper, pour order 4): 61.85,145.84 56.98,150.72 56.98,889 78.77,910.79 1769.07,910.79 1823.75,856.12 1823.75,587.53 1921.59,489.69 1921.59,88.74 1896.78,63.93 144.02,63.93 137.75,70.2 137.5,70.2

## Keep-outs
Top Layer:
  region: 726.84,761.82
Keep-Out Layer:
  rectangle: 639.76,716.23 899.67,880.79

## Silkscreen, mask and mechanical layers (free items; w line width, h text height)
Top Overlay:
  text "AbyJ" at 1433.86,144.48 h30
Mechanical 1:
  lines w10: 56.98,889.09 56.98,155.86 ccw(c149.04,155.99) 149.18,63.93 1896.78,63.93 ccw(c1896.78,88.74) 1921.59,88.74 1921.59,489.69 1823.75,587.53 1823.75,836.53 ccw(c1746.96,833.93) 1744.37,910.72 ; 57.07,889.09 cw(c81.49,886.29) 81.49,910.87 ; 81.49,910.79 1744.37,910.79